# EAGLE board brush (EAGLE 6.3)
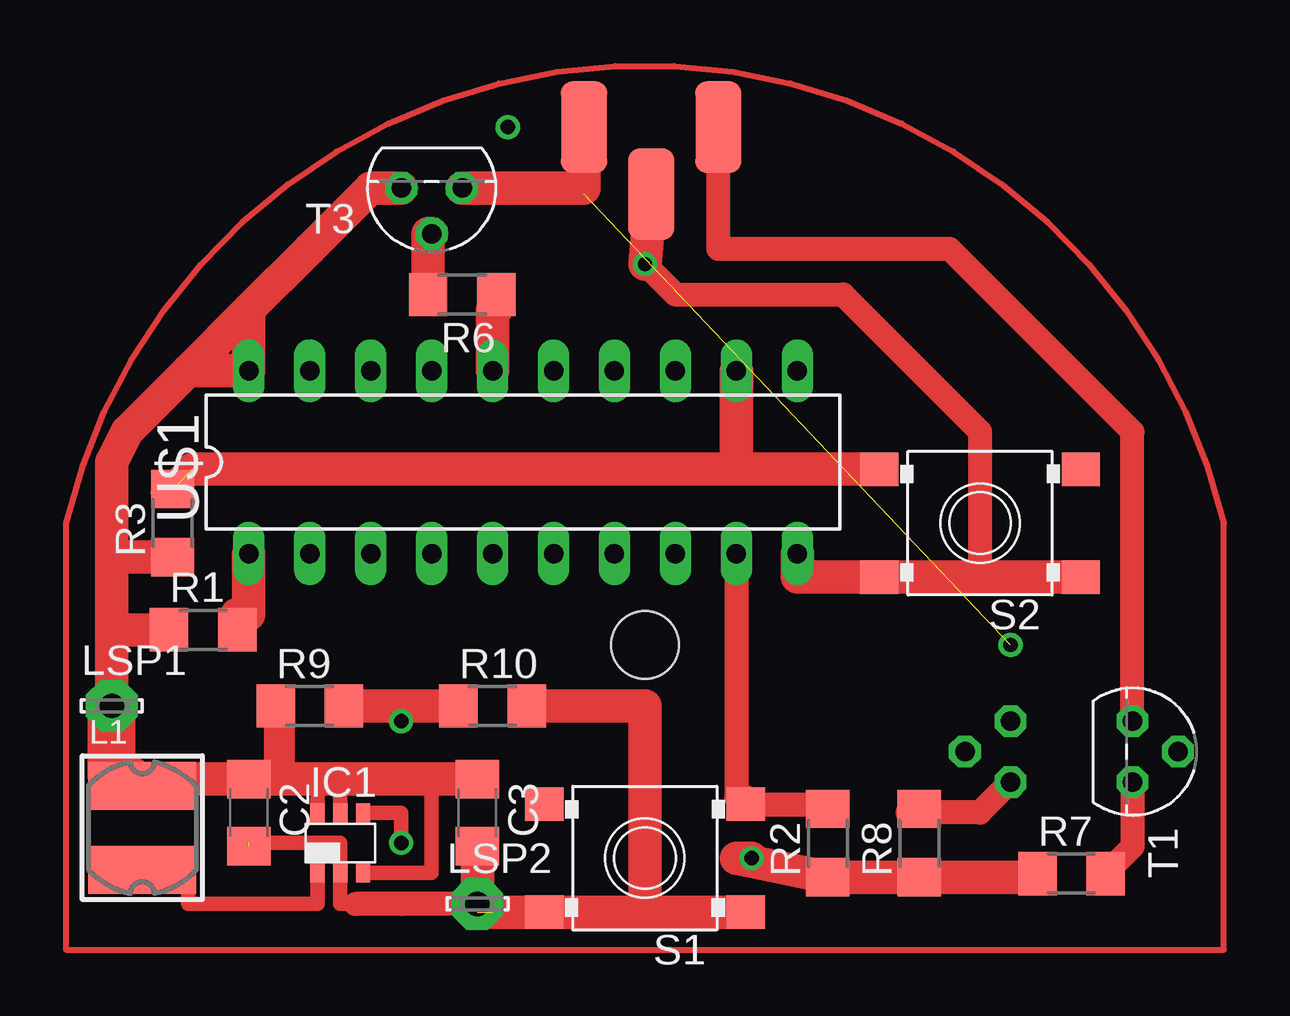
[diagram p0: board, top side]
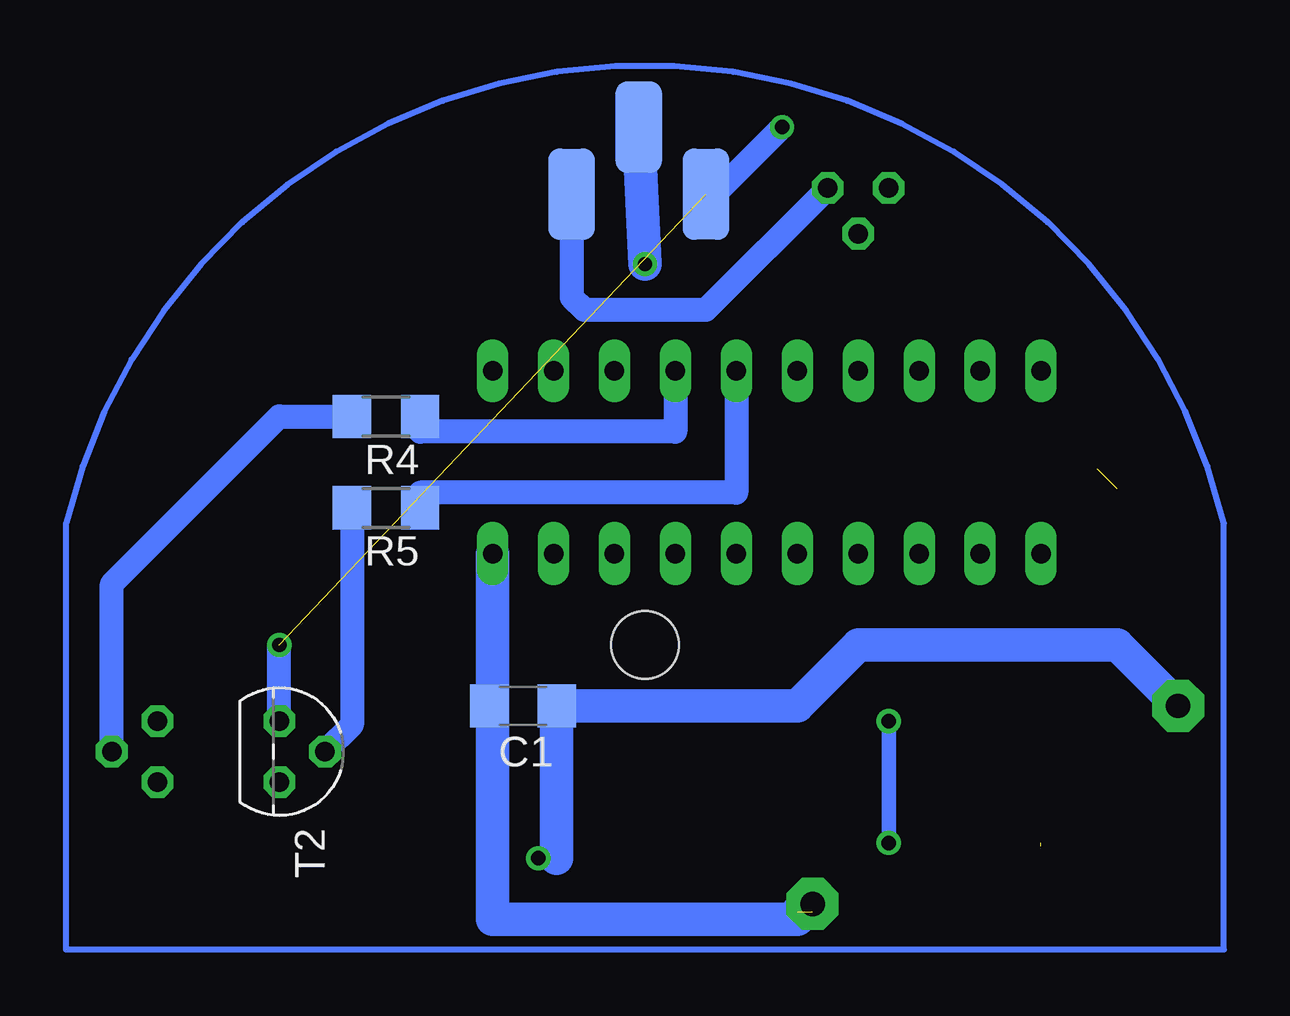
[diagram p1: board, bottom side, seen from below]

No outline drawn. Coordinates in mm, seen from the top.
Copper layers (1*16): Top 0.035mm / dielectric 1.5mm / Bottom 0.035mm
Design rules "default": minimum track width 10mil, minimum drill 24mil, track to track 8mil, track to pad 8mil, pad to pad 8mil, via to via 8mil, smd to smd 8mil, copper to edge 40mil, drill to drill 8mil, minimum pad ring 10mil, minimum via ring 8mil, stop-mask expansion 4mil, vias tented up to drill 0mil, thermal gap 10mil
Holes 2.8 mm at 24.13,12.7

## Footprints (pad centres in the part's own frame; a part is rotated, then mirrored left to right if it is on the bottom)
C1206 = smd 1.6 x 1.8: 1 -1.4,0; 2 1.4,0
LED-RGB-THRU = smd 1.93 x 3.81: BLUE1 0,0; CATHODE1 2.8,-2.8; RED 5.6,0 | smd 1.93 x 3.81 bottom: BLUE2 5.6,-2.8; CATHODE2 2.8,0; GREEN 0,-2.8
TSOT23-6_DDC = smd 0.6 x 0.8: 1 -0.95,-1.25; 2 0,-1.25; 3 0.95,-1.25; 4 0.95,1.25; 5 0,1.25; 6 -0.95,1.25
CR43 = smd 4.5 x 2: 1 0,1.75; 2 0,-1.75
LSP10 = drill 1.016 pad 2.159 octagon: MP 0,0
R1206 = smd 1.6 x 1.803: 1 -1.422,0; 2 1.422,0
SKHMPXE010 = smd 1.6 x 1.4: 1 -4.2,2.25; 2 4.2,2.25; 3 -4.2,-2.25; 4 4.2,-2.25
TO92 = drill 0.813 octagon: 1 1.27,0; 2 0,1.905; 3 -1.27,0
DIL20 = drill 0.813 long: 1 -11.43,-3.81; 2 -8.89,-3.81; 3 -6.35,-3.81; 4 -3.81,-3.81; 5 -1.27,-3.81; 6 1.27,-3.81; 7 3.81,-3.81; 8 6.35,-3.81; 9 8.89,-3.81; 10 11.43,-3.81; 11 11.43,3.81; 12 8.89,3.81; 13 6.35,3.81; 14 3.81,3.81; 15 1.27,3.81; 16 -1.27,3.81; 17 -3.81,3.81; 18 -6.35,3.81; 19 -8.89,3.81; 20 -11.43,3.81

## Placement (x,y rotation side)
C1  1μ  [C1206]  29.21,10.16 180 bottom
C2  10μ  [C1206]  7.62,5.71 270 top
C3  10μ  [C1206]  17.14,5.71 270 top
D1  LED-RGB-CC-THRUDIFFUSE  [LED-RGB-THRU]  21.59,34.29 0 top
IC1  TPS61070DDC  [TSOT23-6_DDC]  11.43,4.45 0 top
L1  4.7μ  [CR43]  3.17,5.08 0 top
LSP1  LSP10  [LSP10]  1.91,10.16 0 top
LSP2  LSP10  [LSP10]  17.14,1.91 0 top
R1  10k  [R1206]  5.71,13.34 0 top
R2  10k  [R1206]  31.75,4.45 90 top
R3  10k  [R1206]  4.45,17.78 90 top
R4  10k  [R1206]  34.92,22.23 180 bottom
R5  10k  [R1206]  34.92,18.41 180 bottom
R6  5.6k  [R1206]  16.51,27.3 180 top
R7  100  [R1206]  41.91,3.17 0 top
R8  100  [R1206]  35.56,4.45 90 top
R9  1.5M  [R1206]  10.16,10.16 0 top
R10  220k  [R1206]  17.78,10.16 0 top
S1  SKHMPSE010  [SKHMPXE010]  24.13,3.81 180 top
S2  SKHMPSE010  [SKHMPXE010]  38.1,17.78 180 top
T1  2N3904  [TO92]  44.45,8.26 270 top
T2  2N3904  [TO92]  39.37,8.26 270 bottom
T3  2N3904  [TO92]  15.24,31.75 180 top
U$1  TINY2313-*P*  [DIL20]  19.05,20.32 0 top

## Library data of the parts
C1-C3 = rcl
D1 = Gumix; PROD_ID: DIO-09434
IC1 = Gumix; MPN: TPS61070DDCR; OC_FARNELL: 1461062; OC_NEWARK: 64M3125
L1 = inductor-sumida
LSP1 LSP2 = solpad
R1-R10 = resistor
S1 S2 = Gumix
T1-T3 = transistor
U$1 = avr-6

## Nets
GND: C1.2 C2.2 C3.2 D1.CATHODE1 D1.CATHODE2 IC1.2 LSP2.MP R10.2 S1.1 S1.2 S2.1 S2.2 U$1.10
N$1: R1.2 U$1.1
N$2: D1.RED T1.3
N$3: D1.GREEN T2.3
N$4: D1.BLUE1 D1.BLUE2 T3.3
N$5: R4.2 T1.2
N$6: R5.2 T2.2
N$7: R6.2 T3.2
N$8: R4.1 U$1.14
N$9: R5.1 U$1.15
N$10: R6.1 U$1.16
N$11: R7.2 T1.1
N$12: R8.2 T2.1
N$13: IC1.1 L1.2
N$14: IC1.4 R9.2 R10.1
N$15: R2.2 S1.3 U$1.9
N$16: R3.2 S2.4 U$1.12
V+: C1.1 C2.1 C3.1 IC1.3 IC1.5 IC1.6 L1.1 LSP1.MP R1.1 R2.1 R3.1 R7.1 R8.1 R9.1 T3.1 U$1.20

## Tracks (layer width: path | path; a pad name or v marks a point on that pad's centre or on a via)
GND  (via drill 0.6)  (2 unrouted)
  Top 0.6: 7.62,4.45 11.43,4.45 IC1.2 11.43,1.91 13.97,1.91 | 17.14,3.81 C3.2
  Top 1: LSP2.MP 13.97,1.91 12.06,1.91 | v24.13,28.57 25.4,27.3 32.38,27.3 38.1,21.59 38.1,15.53
  Top 1.4: 24.13,1.56 S1.2 17.14,1.56 LSP2.MP 17.14,3.81 | 24.13,1.56 S1.1 | R10.2 24.13,10.16 24.13,1.56 | S2.1 38.1,15.53 S2.2 30.48,15.53 U$1.10 | v24.13,28.57 D1.CATHODE1
  Bottom 1.4: C1.2 30.48,10.16 U$1.10 30.48,1.27 17.78,1.27 17.78,1.56 | D1.CATHODE2 v24.13,28.57
N$1
  Top 1.4: U$1.1 7.62,13.97 7.14,13.97 R1.2
N$2
  Top 1: T1.3 44.45,21.59 36.83,29.21 27.19,29.21 D1.RED
N$3  (via drill 0.6)  (1 unrouted)
  Bottom 1: D1.GREEN 21.59,31.75 20.95,31.75 v18.41,34.29 | T2.3 v39.37,12.7
N$4
  Top 1.4: T3.3 21.59,31.75 D1.BLUE1
  Bottom 1: D1.BLUE2 27.19,27.19 26.67,26.67 21.59,26.67 T3.3
N$5
  Bottom 1: T1.2 46.35,15.24 39.37,22.23 R4.2
N$6
  Bottom 1: R5.2 36.35,9.37 T2.2
N$7
  Top 1.4: T3.2 15.09,29.84 R6.2
N$8
  Bottom 1: U$1.14 22.86,21.59 33.5,21.59 R4.1
N$9
  Bottom 1: U$1.15 20.32,19.05 33.5,19.05 R5.1
N$10
  Top 1.4: U$1.16 17.78,26.67 17.93,26.67 R6.1
N$11
  Top 1: T1.1 44.45,4.29 R7.2
N$12
  Top 1: T2.1 38.1,5.71 35.08,5.71 R8.2
N$13
  Top 0.6: L1.2 5.08,3.33 5.08,1.91 10.48,1.91 IC1.1
N$14  (via drill 0.6 pad 0.81)
  Top 0.6: IC1.4 13.97,5.7 v13.97,4.45 | v13.97,9.53 13.97,10.16
  Top 1.4: R9.2 13.97,10.16 R10.1
  Bottom 0.6: v13.97,9.53 v13.97,4.45
N$15
  Top 1: R2.2 31.11,6.06 S1.3 28.33,6.35 27.94,6.35 U$1.9
N$16  (1 unrouted)
  Top 1.4: 27.94,20.03 U$1.12 | 27.94,20.03 25.4,20.03 5.27,20.03 | S2.4 27.94,20.03
N$17
  Top 0.6: 3.81,19.05 5.08,20.32
S$1  (1 unrouted)
  Top 0.254: 0,17.78 arc-153 48.26,17.78 48.26,0 0,0 0,17.78
  Bottom 0.254: 0,0 48.26,0 48.26,17.78 arc153 0,17.78 0,0
V+  (via drill 0.6)
  Top 0.6: IC1.5 11.43,6.99 | 11.43,6.99 10.48,6.99 IC1.6 | 11.43,7.12 11.43,6.99 | C3.1 15.24,7.12 15.24,3.19 IC1.3 | 2.54,7.12 2.59,7.09 L1.1
  Top 1.3: R9.1 8.89,10.16 8.89,7.12
  Top 1.4: 2.59,7.09 2.59,7.12 C2.1 8.89,7.12 11.43,7.12 C3.1 | 1.91,16.36 1.91,20.32 2.54,21.59 5.08,24.13 | 1.91,16.36 1.91,13.34 | 1.91,13.34 LSP1.MP | R3.1 1.91,16.36 | R1.1 1.91,13.34 | T3.1 12.7,31.75 10.16,29.21 7.62,26.67 | 7.62,26.67 U$1.20 5.08,24.13 | R7.1 40.34,3.02 R8.1 R2.1 27.94,3.81 v28.57,3.81 | 7.62,26.67 5.08,24.13
  Top 2: 2.59,7.12 1.91,7.12 LSP1.MP
  Bottom 0.6: v28.57,3.81 27.81,3.81
  Bottom 1.4: LSP1.MP 4.45,12.7 15.24,12.7 17.78,10.16 C1.1 27.81,3.81